# Altium PCB PCB1 - 副本.PcbDoc (part 1 of 2)
Units mil, origin at the board's own origin, x right, y up, seen from the top; angles counter-clockwise.
Board outline 3110.24 x 2637.8 mil, 4 copper layers (Top Layer, GND, PWR, Bottom Layer), stack 30.634 mil thick; 254 components, 131 nets, 691 pads, 4 vias.
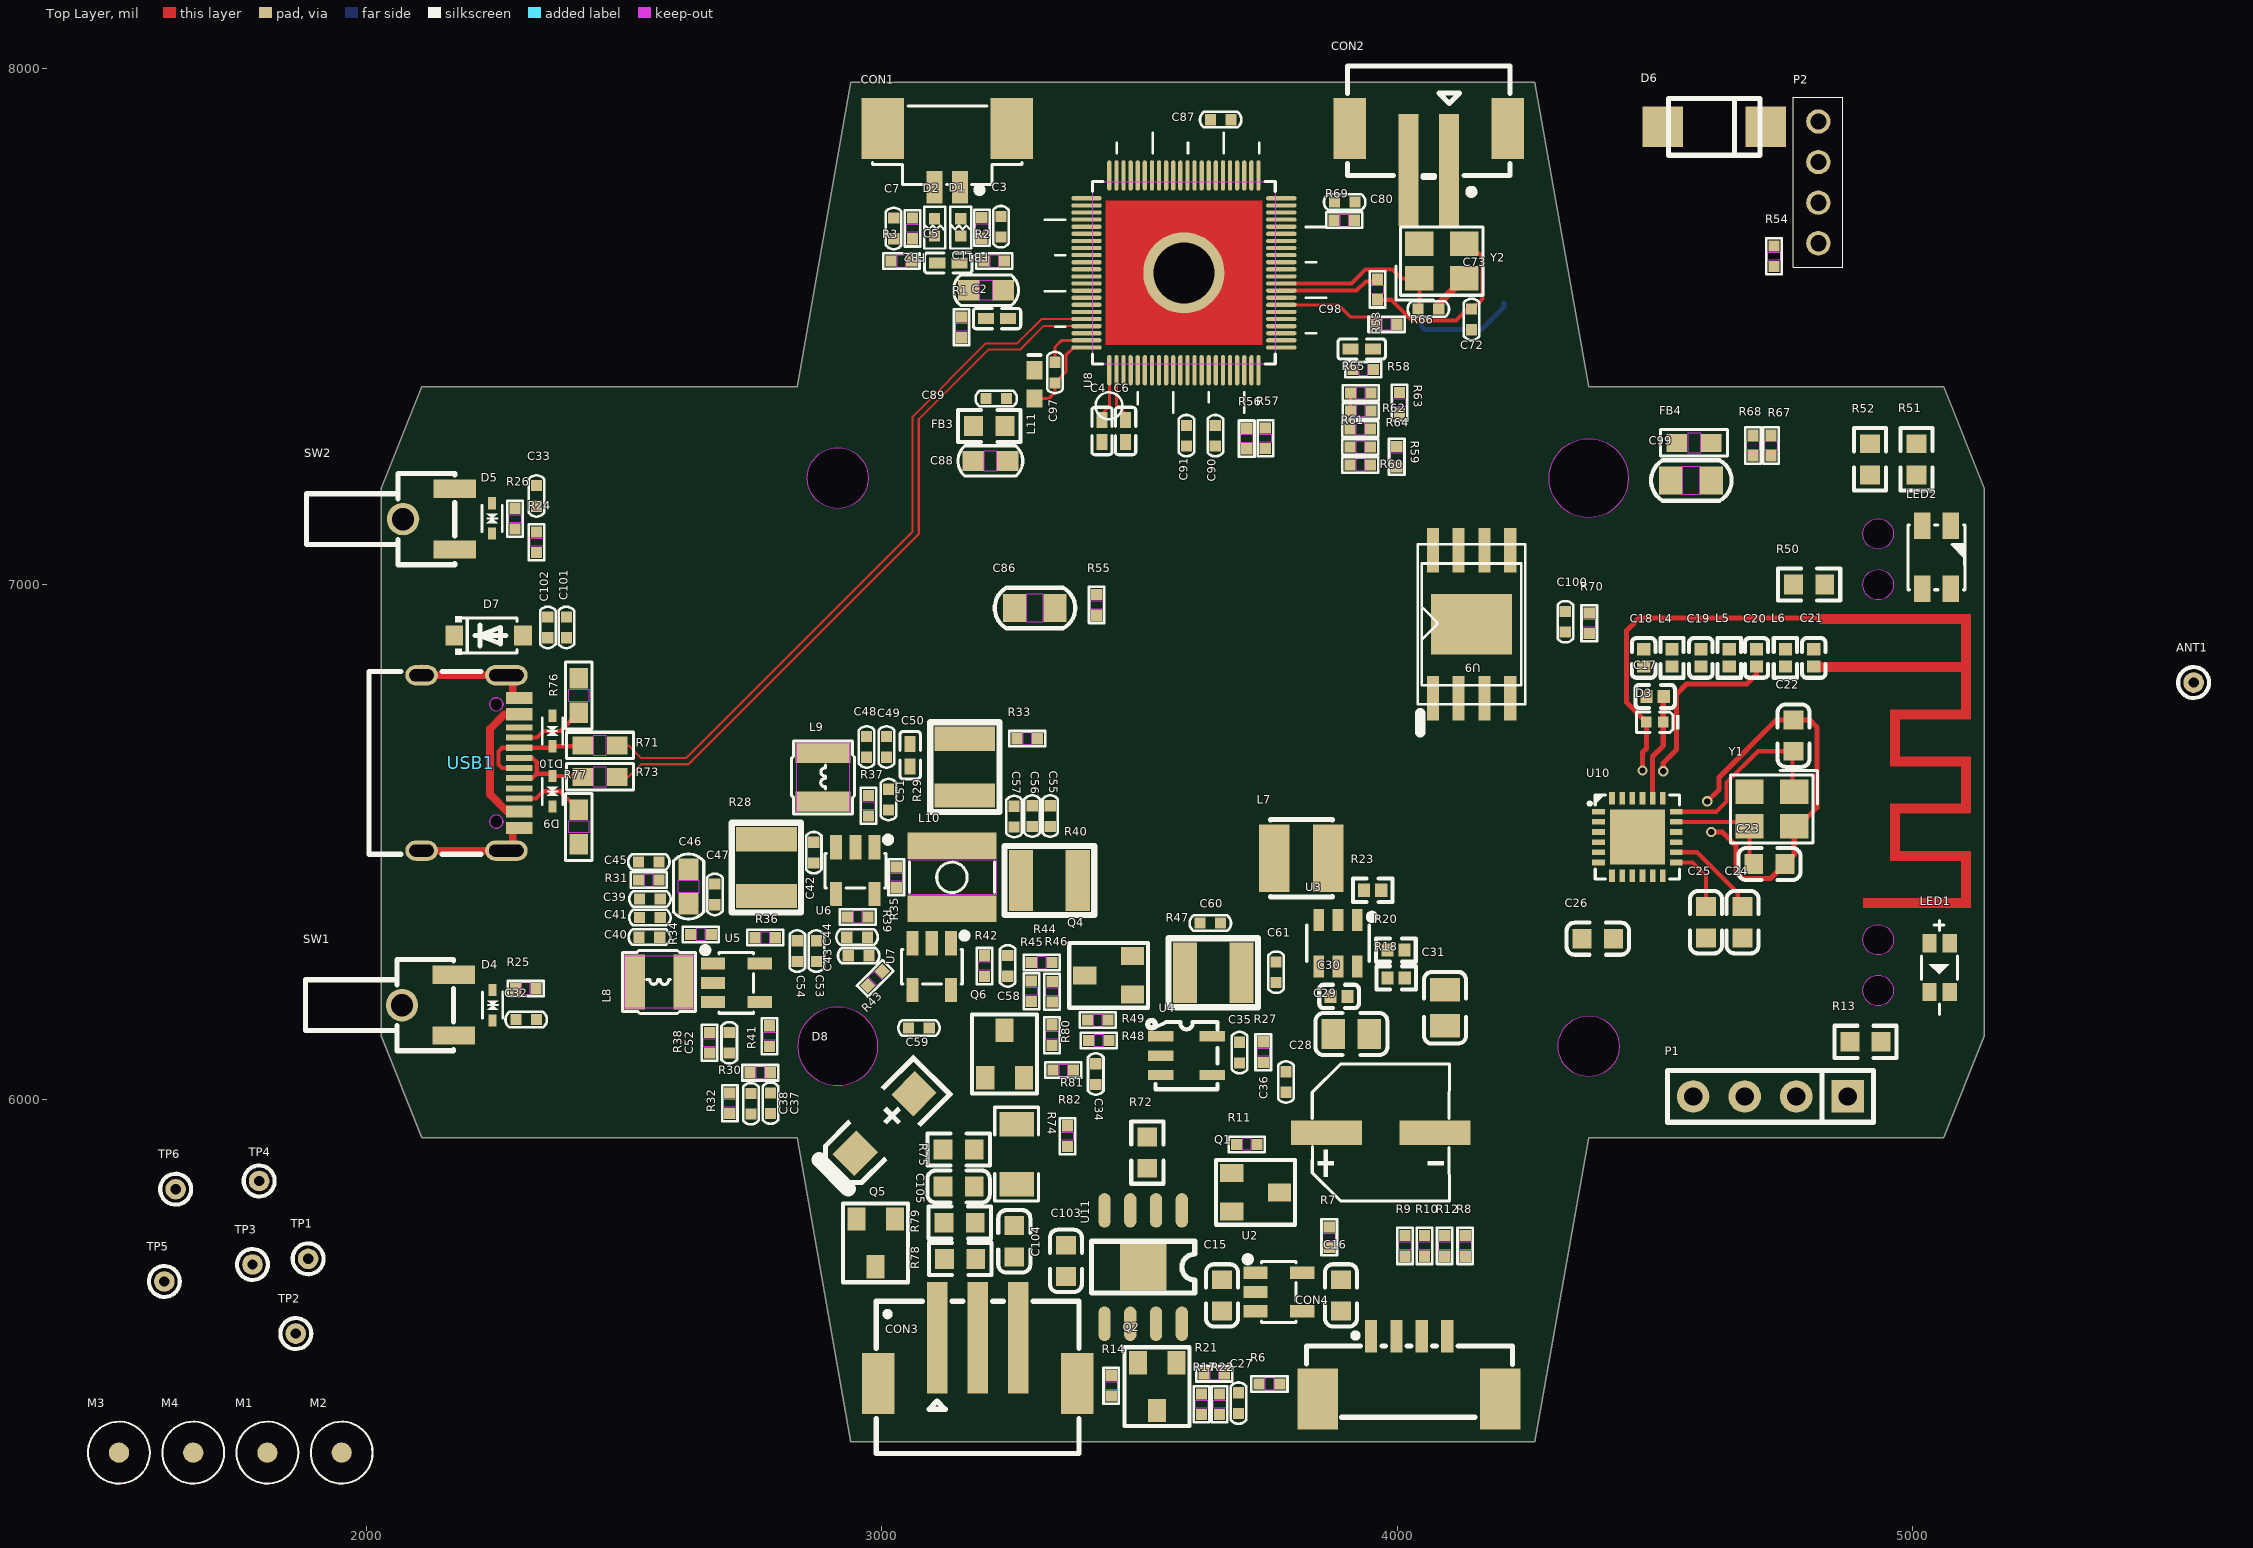
[diagram p0: Top Layer view]
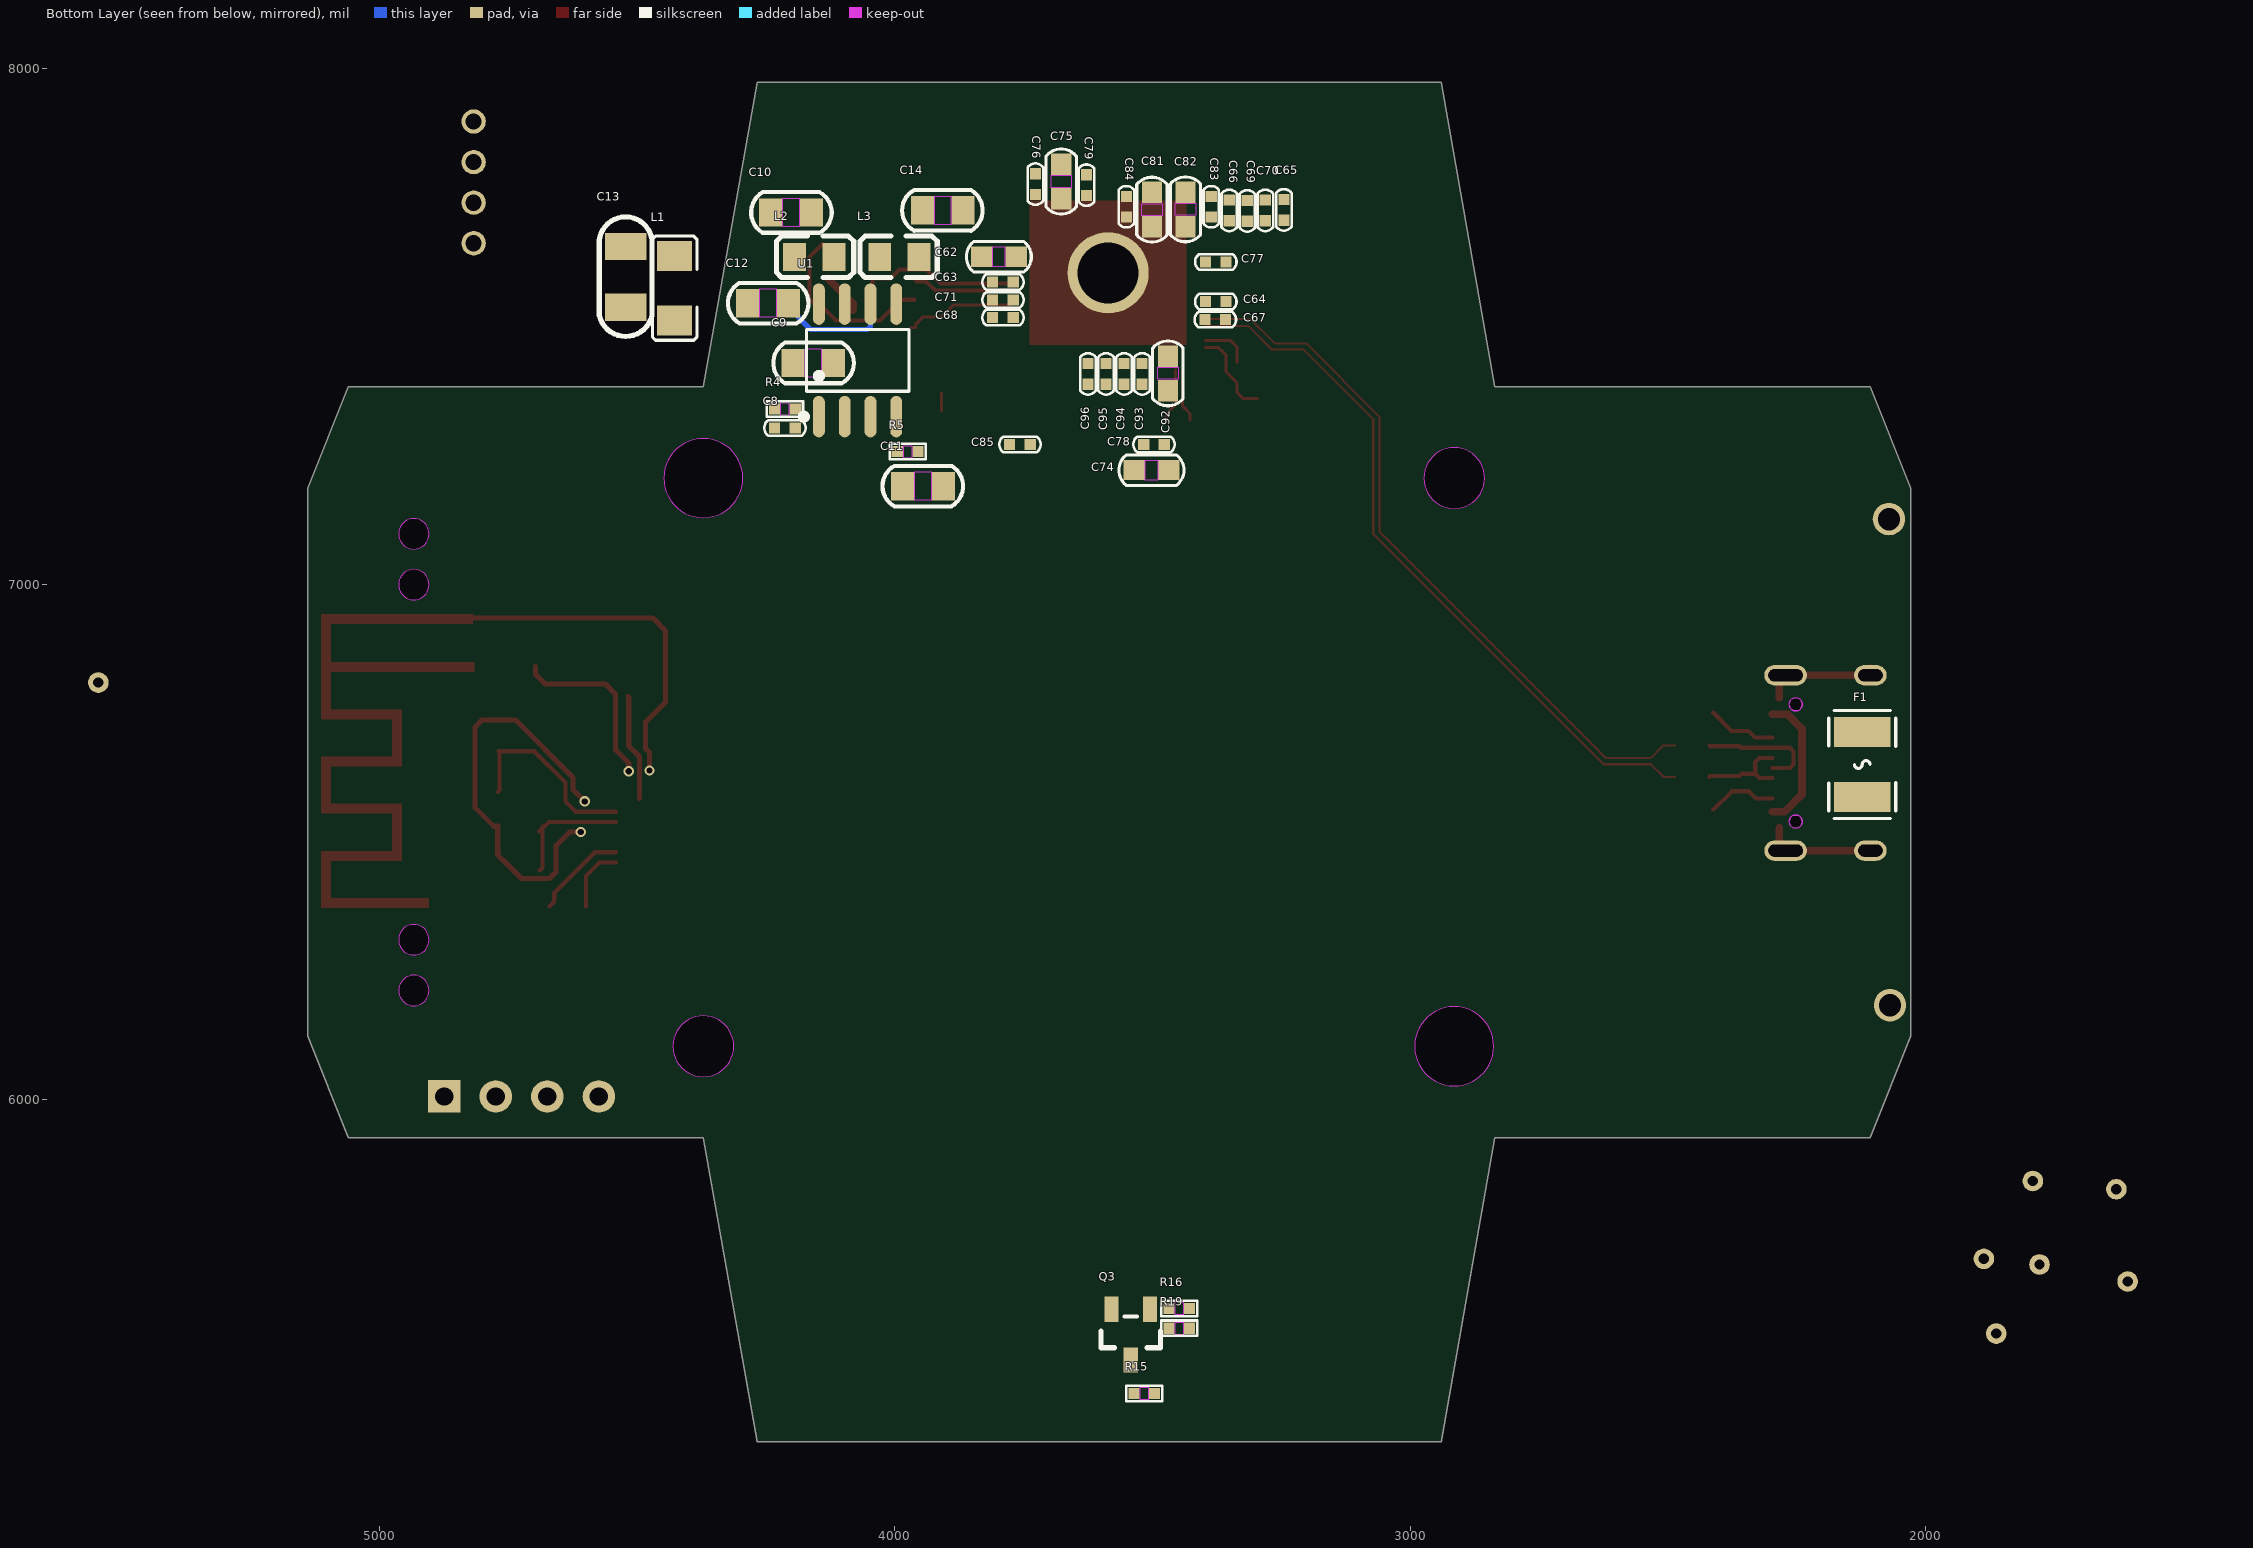
[diagram p1: Bottom Layer view, seen from below]
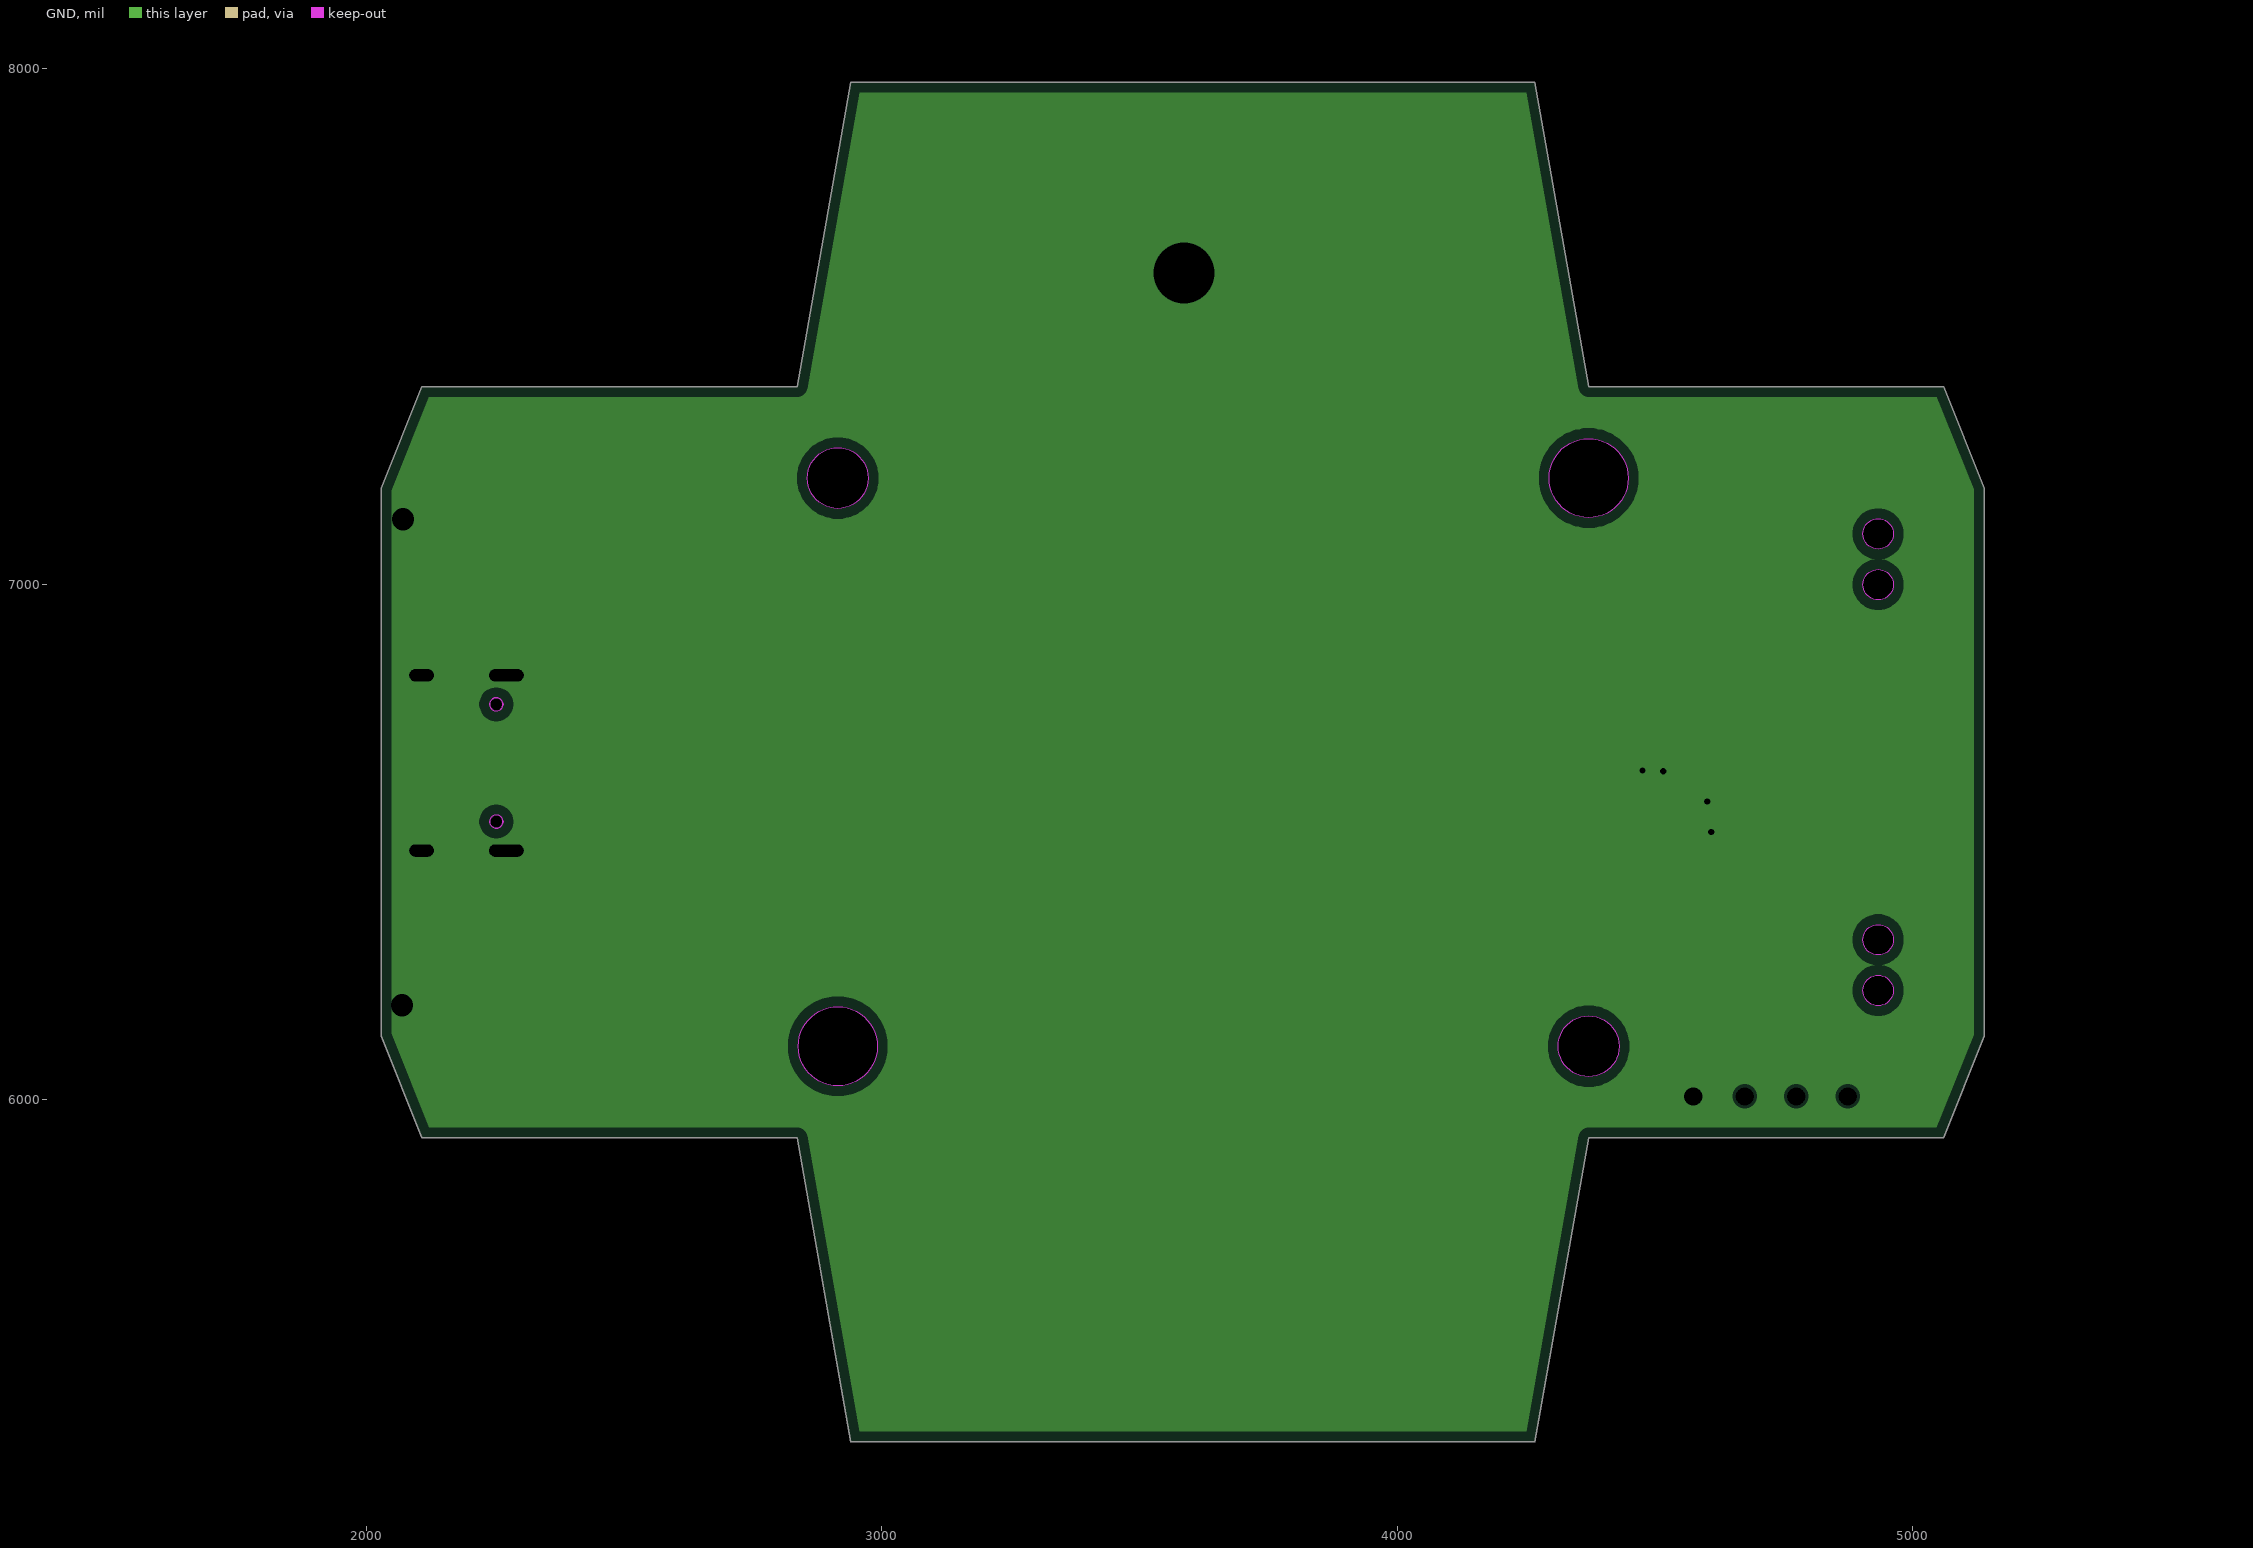
[diagram p2: GND, clearances drawn from the general rule]
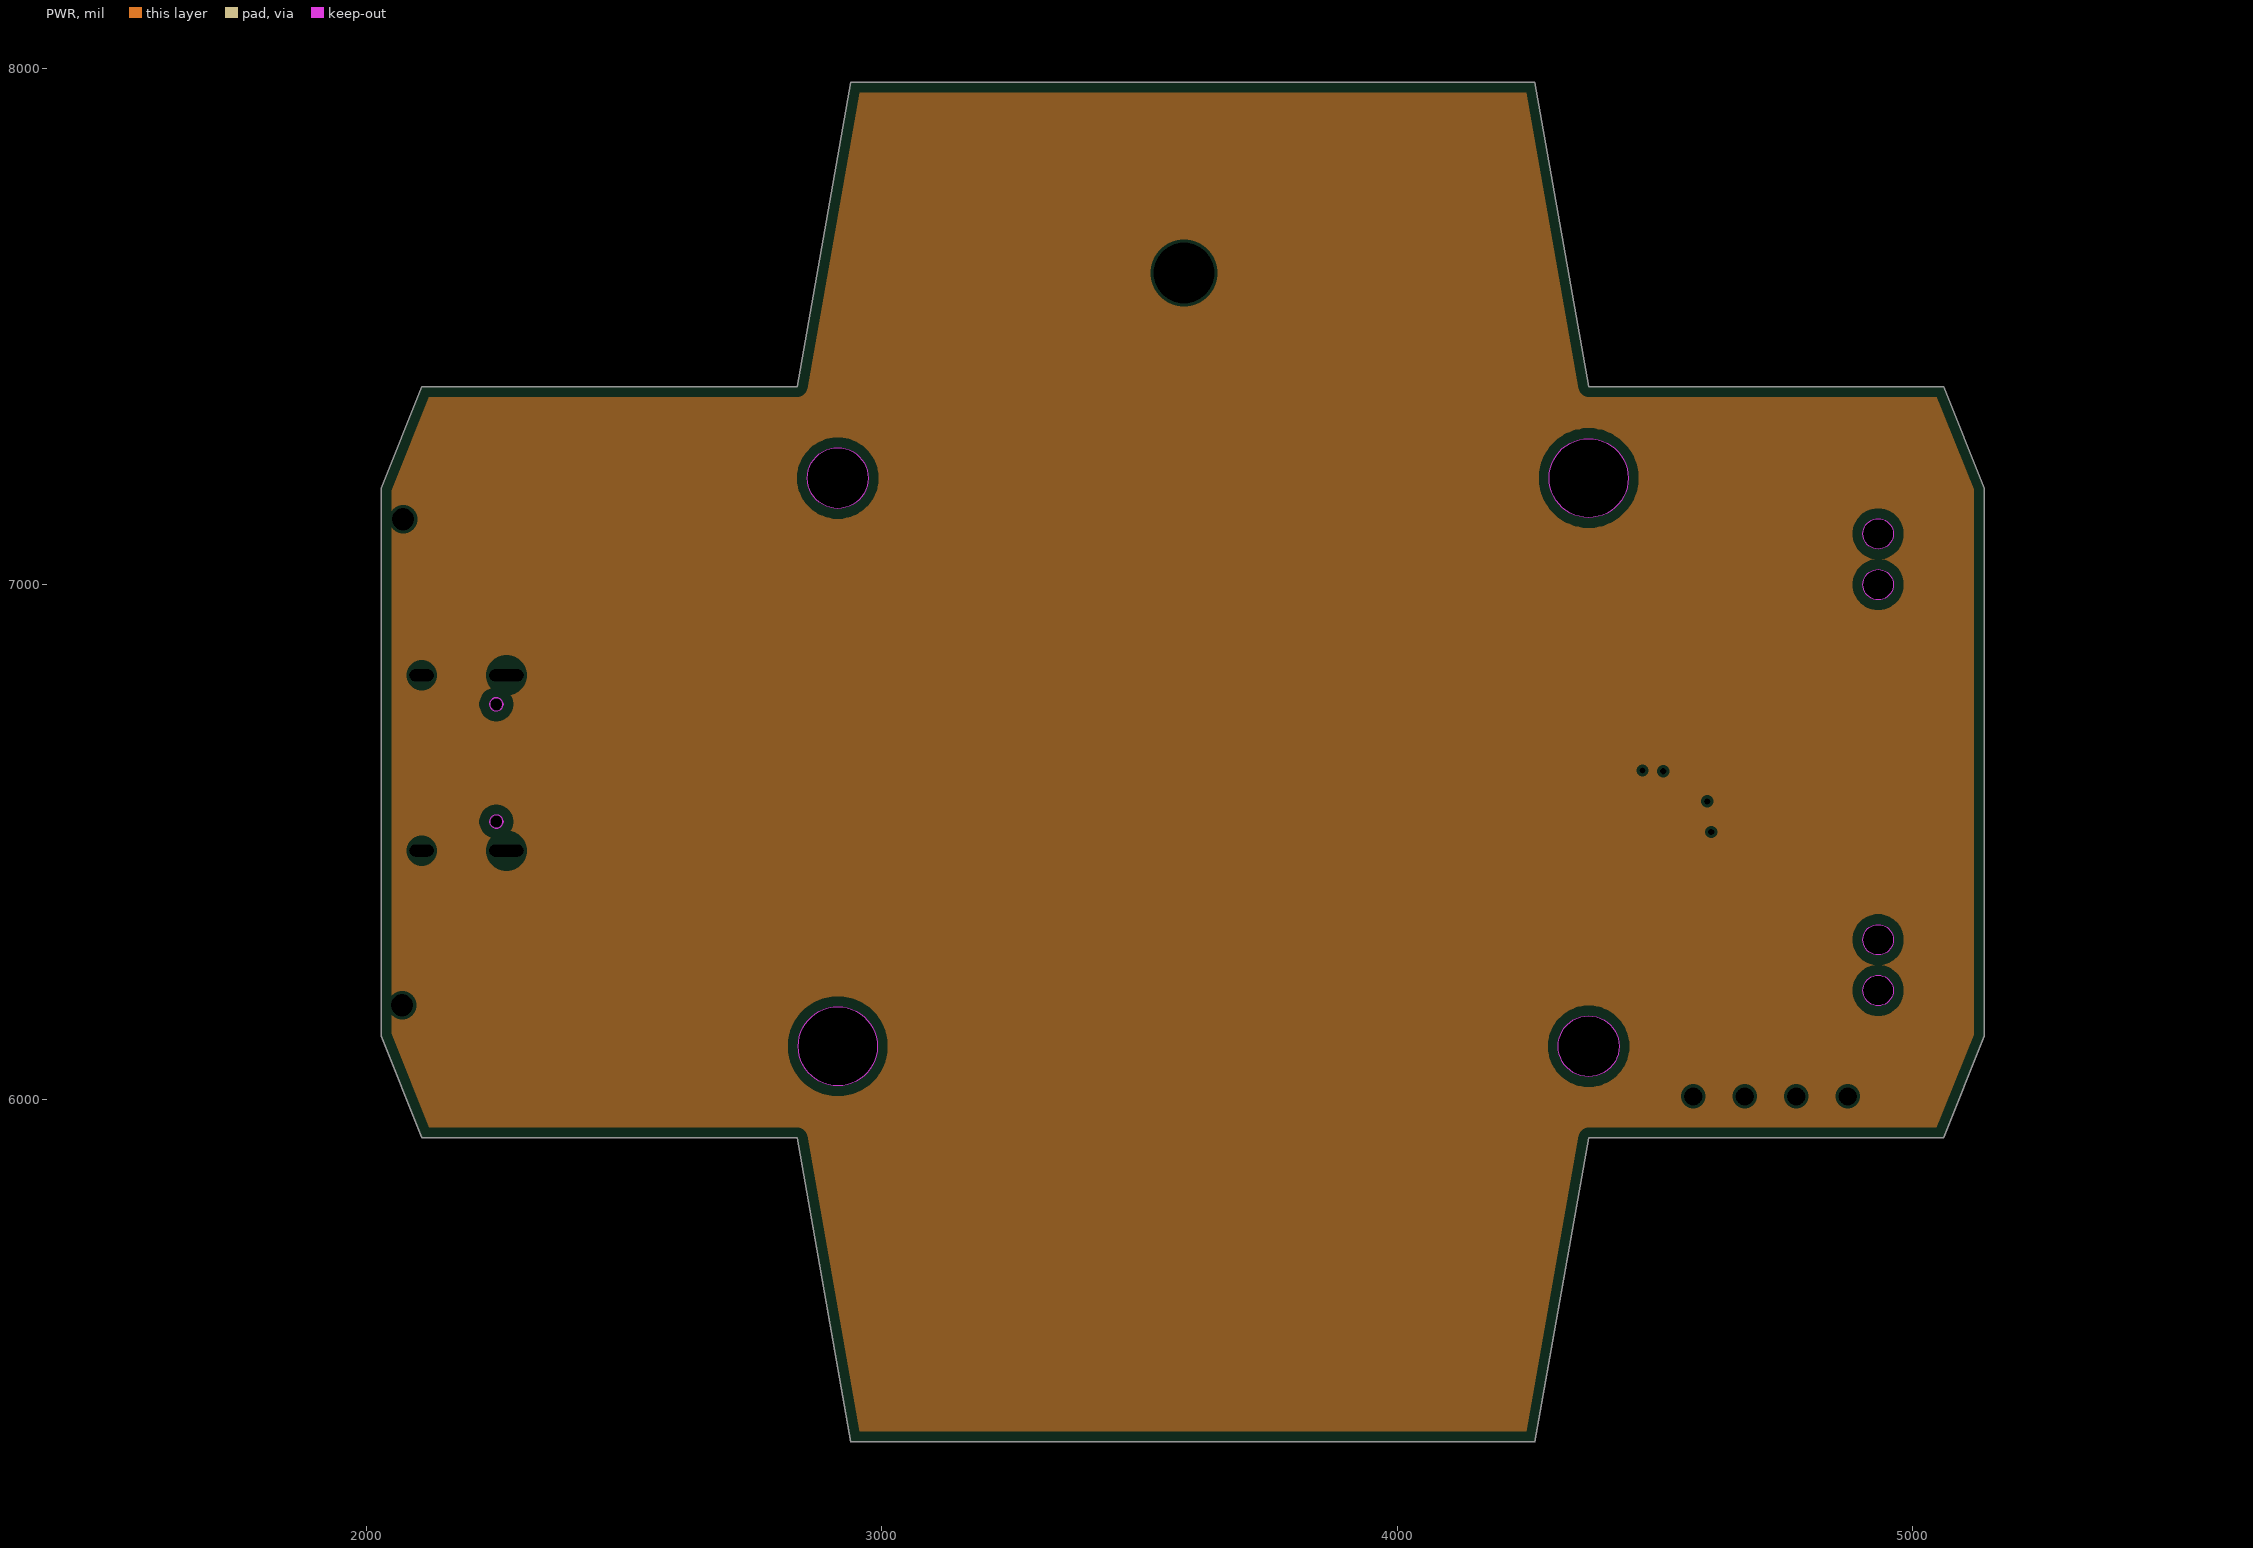
[diagram p3: PWR, clearances drawn from the general rule]

## Layer stack, top to bottom
Top Solder: solder mask 0.4, Solder Resist, Dk 3.5
Top Layer: signal copper 1.4
Dielectric1: core 10, FR-4, Dk 4.2
GND: plane copper 1.417, net DGND
Dielectric 3: prepreg 5, Dk 4.2
PWR: plane copper 1.417
Dielectric 2: core 10, Dk 4.2
Bottom Layer: signal copper 1.4
Bottom Solder: solder mask 0.4, Solder Resist, Dk 3.5

## Board outline
2107.48,5926.15 2835.82,5926.15 2939.95,5335.6 4267.13,5335.6 4371.26,5926.15 5060.23,5926.15 5138.97,6123 5138.97,7185.99 5060.23,7382.84 4371.26,7382.84 4267.13,7973.39 2939.95,7973.39 2835.82,7382.84 2107.48,7382.84 2028.74,7185.99 2028.74,6123
cut-out: 4932.86,6280.48 cw(c4932.86,6310.01) 4903.34,6310.01 cw(c4932.86,6310.01) 4932.86,6339.54 cw(c4932.86,6310.01) 4962.39,6310.01 cw(c4932.86,6310.01)
cut-out: 4932.86,6182.06 cw(c4932.86,6211.58) 4903.34,6211.58 cw(c4932.86,6211.58) 4932.86,6241.11 cw(c4932.86,6211.58) 4962.39,6211.58 cw(c4932.86,6211.58)
cut-out: 4932.86,7067.88 cw(c4932.86,7097.41) 4903.34,7097.41 cw(c4932.86,7097.41) 4932.86,7126.94 cw(c4932.86,7097.41) 4962.39,7097.41 cw(c4932.86,7097.41)
cut-out: 4903.34,6998.99 cw(c4932.86,6998.99) 4932.86,7028.51 cw(c4932.86,6998.99) 4962.39,6998.99 cw(c4932.86,6998.99) 4932.86,6969.46 cw(c4932.86,6998.99)
cut-out: 2914.56,7146.62 cw(c2914.56,7205.68) 2855.51,7205.68 cw(c2914.56,7205.68) 2914.56,7264.73 cw(c2914.56,7205.68) 2973.62,7205.68 cw(c2914.56,7205.68)
cut-out: 2914.56,6026.54 cw(c2914.56,6103.32) 2837.79,6103.32 cw(c2914.56,6103.32) 2914.56,6180.09 cw(c2914.56,6103.32) 2991.34,6103.32 cw(c2914.56,6103.32)
cut-out: 4371.26,6044.26 cw(c4371.26,6103.32) 4312.2,6103.32 cw(c4371.26,6103.32) 4371.26,6162.37 cw(c4371.26,6103.32) 4430.31,6103.32 cw(c4371.26,6103.32)
cut-out: 4371.26,7128.91 cw(c4371.26,7205.68) 4294.48,7205.68 cw(c4371.26,7205.68) 4371.26,7282.45 cw(c4371.26,7205.68) 4448.03,7205.68 cw(c4371.26,7205.68)

## Design rules (kind name [scope] priority, off if disabled: settings)
Clearance [All] p1: gap=4 ignorepadtopadclearanceinfootprint=FALSE
ComponentClearance [All] p1: gap=0 collisioncheckmode=3 verticalgap=0 showdistances=FALSE
DiffPairsRouting [InDifferentialPair('USB')] p1: maxlimit=8 minlimit=8 mostfreqgap=8 toplayer_minwidth=4 toplayer_maxwidth=4 toplayer_prefwidth=4 bottomlayer_minwidth=4 bottomlayer_maxwidth=4 bottomlayer_prefwidth=4 maxuncoupledlength=500
FabricationTestPointUsage TestPointUsage [All] p1: valid=0 allowmultiple=FALSE
FabricationTestpoint Testpoint [All] p1: side=3 testpointundercomponent=TRUE minsize=40 maxsize=100 preferedsize=60 minholesize=0 maxholesize=40 preferedholesize=32 testpointgrid=1 allowsidetop=TRUE allowsidebottom=TRUE usegrid=TRUE gridtolerance=0.01
PlaneClearance [All] p1: clearance=6
PlaneConnect [All] p1: planeconnectstyle=Relief reliefexpansion=20 reliefentries=4 reliefconductorwidth=10 reliefairgap=10
PolygonConnect [All] p1: thpad.connectstyle=Relief thpad.reliefconductorwidth=10 thpad.reliefentries=4 thpad.polygonreliefangle="90 Angle" thpad.airgapwidth=10 smdpad.connectstyle=Relief smdpad.reliefconductorwidth=10 smdpad.reliefentries=4 smdpad.polygonreliefangle="90 Angle" smdpad.airgapwidth=10 via.connectstyle=Direct via.reliefconductorwidth=10 via.reliefentries=4 via.polygonreliefangle="90 Angle" via.airgapwidth=10
RoutingVias [All] p1: holewidth=16 width=28 viastyle="Through Hole" minholewidth=12 minwidth=20 maxholewidth=24 maxwidth=40
SilkToSilkClearance [All] p1: silktosilkclearance=1
SilkToSolderMaskClearance SilkscreenOverComponentPads [IsPad] p1: minsilkscreentomaskgap=0 clearancetoexposedcopper=TRUE
SolderMaskExpansion [All] p1: expansion=4
Width [All] p1: maxlimit=40 minlimit=4 preferedwidth=6
22 further rules are at their usual default settings.

## Classes and differential pairs
component class AUDIO: C1 C2 C3 C4 C5 C6 C7 C8 C9 C10 C11 C12 C13 C14 CON1 CON2 D1 D2 FB1 FB2 L1 L2 L3 R1 R2 R3 R4 R5 U1
component class Bluetooth: *1 ANT1 C15 C16 C17 C18 C19 C20 C21 C22 C23 C24 C25 C26 C27 C28 C29 C30 C31 C32 C33 CON4 D3 D4 D5 L4 L5 L6 L7 LED1 P1 Q1 Q2 Q3 R6 R7 R8 R9 R10 R11 R12 R13 R14 R15 R16 R17 R18 R19 R20 R21 R22 R23 R24 R25 R26 SW1 SW2 TP1 TP2 U2 U3 U10 Y1
component class POWER: C34 C35 C36 C37 C38 C39 C40 C41 C42 C43 C44 C45 C46 C47 C48 C49 C50 C51 C52 C53 C54 C55 C56 C57 C58 C59 C60 C61 L8 L9 L10 M1 M2 M3 M4 Q4 R27 R28 R29 R30 R31 R32 R33 R34 R35 R36 R37 R38 R39 R40 R41 R42 R43 R44 R45 R46 R47 R48 R49 TP3 TP4 TP5 TP6 U4 U5 U6 U7
component class QFN88_FLASH_UART: C62 C63 C64 C65 C66 C67 C68 C69 C70 C71 C72 C73 C74 C75 C76 C77 C78 C79 C80 C81 C82 C83 C84 C85 C86 C87 C88 C89 C90 C91 C92 C93 C94 C95 C96 C97 C98 C99 C100 D6 FB3 FB4 L11 LED2 P2 R50 R51 R52 R53 R54 R55 R56 R57 R58 R59 R60 R61 R62 R63 R64 R65 R66 R67 R68 R69 R70 U8 U9 Y2
component class USB_CHARGE: C101 C102 C103 C104 C105 CON3 D7 D8 D9 D10 F1 J2 Q5 Q6 R71 R72 R73 R74 R75 R76 R77 R78 R79 R80 R81 R82 U11 USB1
differential pair USB_1: +USB_DM -USB_DP
differential pair USB: +USB_DM -USB_DP

## Components (designator, comment, footprint, x,y, rotation, side; value= is the part's Value field where it differs from the comment)
ANT1 "" TP 5545,6809 r90 top
C1 "10uF" C0603 3202,7570 r180 top
C2 "100nF" C0402#1 3223.46,7515 r0 top
C3 "33pF" C0402#2 3231,7693.35 r270 top
C4 "100nF" C0402#1 3427,7297 r90 top
C5 "1.5nF" C0402#1 3129,7623 r180 top
C6 "100nF" C0402#1 3473,7297 r90 top
C7 "33pF" C0402#2 3023,7690 r90 top
C8 "100nF" C0402#2 4213,7303 r0 bottom
C9 "1uF" C0805 4158,7429 r180 bottom
C10 "1nF" C0805 4201,7721 r180 bottom
C11 "47nF" C0805 3945,7190 r0 bottom
C12 "100nF" C0805 4246,7545 r180 bottom
C13 "47uF" C1206 4522,7596 r90 bottom
C14 "1nF" C0805 3907,7725 r0 bottom
C15 "1uf" 0603_C 3660,5620 r90 top
C16 "10uF" 0603_C 3891,5620 r90 top value=10nF
C17 "220pF" 0402_C 4500.27,6782 r180 top
C18 "NC" 0402_C 4478,6856.73 r90 top
C19 "NC" 0402_C 4589,6856.73 r270 top
C20 "NC" 0402_C 4697,6856.73 r90 top
C21 "NC" 0402_C 4808,6856.73 r270 top
C22 "12PF" 0603_C 4769,6706 r270 top
C23 "12PF" 0603_C 4722,6457 r180 top
C24 "1UF" 0603_C 4670,6344 r270 top
C25 "1UF" 0603_C 4599,6344 r270 top
C26 "1UF" 0603_C 4389,6312 r0 top
C27 "100nF" C0402#2 3692,5411 r90 top
C28 "100uF/25V" "SMD 6.3*5.4 电解" 3974,5935 r0 top value=220uF
C29 "22UF" 0805_C 3911,6127 r180 top
C30 "1UF" 0402_C 3887,6200 r180 top
C31 "22UF" 0805_C 4092.49,6178.04 r90 top
C32 "100nF" C0402#2 2310,6155 r0 top
C33 "100nF" C0402#2 2330,7171 r270 top
C34 "10uF" C0402#2 3415,6049.49 r90 top
C35 "10uF" C0402#2 3694,6091 r90 top
C36 "100nF" C0402#2 3784,6034 r90 top
C37 "10uF" C0402#2 2784,5993 r90 top
C38 "100nF" C0402#2 2746,5992 r90 top
C39 "22uF" C0402#2 2550,6389 r0 top
C40 "10uF" C0402#2 2549,6315 r0 top
C41 "100nF" C0402#2 2550,6353 r0 top
C42 "100nF" C0402#2 2868,6479 r270 top
C43 "10uF" C0402#2 2955,6279 r180 top
C44 "100nF" C0402#2 2952,6315 r180 top
C45 "22uF" C0402#2 2548,6461 r0 top
C46 "10uF_10V" C0603 2625,6413.2 r90 top
C47 "100nF" C0402#2 2676,6398 r90 top
C48 "22uF" C0402#2 2970.54,6684 r90 top
C49 "10uF" C0402#2 3009,6684 r90 top
C50 "100nF" C0402#1 3055,6668 r270 top
C51 "100nF" C0402#2 3013,6582 r270 top
C52 "100nF" C0402#2 2704,6110 r270 top
C53 "10uF" C0402#2 2873,6288 r270 top
C54 "100nF" C0402#2 2836,6288 r270 top
C55 "22uF" C0402#2 3326.68,6550 r270 top
C56 "22uF" C0402#2 3291.68,6550 r270 top
C57 "100nF" C0402#2 3256.68,6549 r270 top
C58 "47pF" C0402#2 3244.21,6259.3 r270 top
C59 "220nF" C0402#2 3072,6139 r180 top
C60 "100nF" C0402#2 3637.32,6342.19 r0 top
C61 "100nF" C0402#2 3765,6247 r90 top
C62 "10uF" C0603 3798,7635 r0 bottom locked
C63 "100nF" C0402#2 3790,7586 r180 bottom locked
C64 "100nF" C0402#2 3377,7548 r0 bottom locked
C65 "100nF" C0402#2 3245,7726 r270 bottom
C66 "100nF" C0402#2 3351,7725 r270 bottom locked
C67 "100nF" C0402#2 3378,7513 r0 bottom locked
C68 "100nF" C0402#2 3790,7517 r180 bottom locked
C69 "100nF" C0402#2 3316,7724 r270 bottom locked
C70 "100nF" C0402#2 3281,7725 r270 bottom
C71 "100nF" C0402#2 3790,7551.31 r180 bottom locked
C72 "18pF" C0402#2 4060.31,7533.53 r180 top
C73 "18pF" C0402#2 4144.31,7513.53 r90 top
C74 "10uF" C0603 3502,7221 r0 bottom locked
C75 "10uF" C0603 3677,7781 r90 bottom locked
C76 "100nF" C0402#2 3727,7776 r270 bottom locked
C77 "100nF" C0402#2 3377,7625 r0 bottom locked
C78 "100nF" C0402#2 3497,7271 r180 bottom locked
C79 "100nF" C0402#2 3628,7774 r270 bottom locked
C80 "100nF" C0402#2 3898,7741 r180 top
C81 "10uF" C0603 3501,7726.46 r90 bottom locked
C82 "10uF" C0603 3436,7727 r90 bottom locked
C83 "100nF" C0402#2 3386,7732 r270 bottom locked
C84 "100nF" C0402#2 3550.54,7732 r270 bottom locked
C85 "100nF" C0402#2 3757,7271 r0 bottom locked
C86 "2.2uF" C0805 3296.6,6953.6 r0 top
C87 "100nF" C0402#2 3657.32,7901 r0 top
C88 "10uF" C0603 3210.54,7238.87 r0 top
C89 "100nF" C0402#2 3222,7359.87 r180 top
C90 "100nF" C0402#2 3647,7288 r90 top
C91 "1uF" C0402#2 3591,7288 r90 top
C92 "10uF" C0603 3470,7408.81 r270 bottom locked
C93 "100nF" C0402#2 3520,7407.81 r90 bottom locked
C94 "100nF" C0402#2 3555,7407.81 r90 bottom locked
C95 "100nF" C0402#2 3590,7407.81 r90 bottom locked
C96 "100nF" C0402#2 3625,7407.81 r90 bottom locked
C97 "10uF" C0402#2 3336,7410.44 r270 top
C98 "NC/100nF" C0402#1 3931,7456 r180 top
C99 "100nF" C0805 4570,7201 r0 top
C100 "100nF" C0402#2 4326,6927 r90 top
C101 "100nF" C0402#2 2388,6916 r90 top
C102 "10uF" C0402#2 2352,6916 r90 top
C103 "10uf" 0603_C 3357,5687 r90 top value=10nF
C104 "10UF" 0603_C 3257,5725 r90 top
C105 "100nF" 0603_C 3149,5831 r0 top
CON1 "MK" CONN-SMD_2P-P1.25-LT 3127,7827 r180 top
CON2 "SPK" CONN-SMD_2.0-2PLT 4069,7868 r0 top
CON3 "BX-PH2.0-3PZZ" CONN-SMD_2.0-3PLT 3223.41,5488.27 r180 top
CON4 "Ultra" CONN-SMD_4P-P1.25_LT 4023,5480 r0 top
D1 "DCE0510D2" D0402_0.55X0.6 3153,7692 r90 top
D2 "DCE0510D2" D0402_0.55X0.6 3102.39,7692 r90 top
D3 "SE6V3LHN102T 6.3v单向" 0402-D 4497,6727 r180 top
D4 "LESD5Z5.0CT1G" SOD-523_L1.2-W0.8-LS1.6-BI 2245,6183.1 r90 top
D5 "LESD5Z5.0CT1G" SOD-523_L1.2-W0.8-LS1.6-BI 2244,7127.48 r90 top
D6 "SS24" DO-214AC 4615,7887 r180 top
D7 "SMF6.0A" SOD-123 2256,6906 r0 top
D8 "SS34" SMA 3020,5973 r45 top
D9 "LESD5Z5.0CT1G" SOD-523_L1.2-W0.8-LS1.6-BI 2361,6598 r90 top
D10 "LESD5Z5.0CT1G" SOD-523_L1.2-W0.8-LS1.6-BI 2361,6715 r270 top
F1 "6V 4A" F1210 2123,6650 r90 bottom
FB1 "0R" R0402 3194,7691 r270 top
FB2 "0R" R0402 3059.6,7690 r270 top
FB3 "FB120R" 0603_R 3208.31,7306.87 r0 top
FB4 "FB120R" R0603 4576,7274 r0 top
L1 "600R" L1206 4427,7574 r90 bottom
L2 "1K 0.5A" L0805 4156,7635 r0 bottom
L3 "1K 0.5A" L0805 3991,7635 r180 bottom
L4 "0R" 0402_R 4533,6856.73 r270 top
L5 "0R" 0402_R 4644,6856.73 r90 top
L6 "0R" 0402_R 4753,6856.73 r270 top
L7 "SLW3012P1R5MST SMD3.0*3.0" IND-SMD_L3.0-W3.0 3856.28,6453 r0 top
L8 "2.2uH/1A" SWPA3015S 2568,6228 r180 top
L9 "2.2uH/1A" SWPA3015S 2886,6625 r90 top
L10 "2.2uH/2.7A" L-MLPS-4018 3136,6431 r0 top
L11 "FB60R/300mA" L0603 3296,7387.44 r270 top
LED1 "*" LED-SMD_4P-L3.2-W1.6-TL_XL-3216SURUGC 5052,6256 r270 top
LED2 "XL-A3528RGBC-BM" LED-ARRAY-SMD_4P-L3.2-W2.8-LS3.5-BL_XL-A3528RGBC-BM 5046,7052 r90 top
M1 "T_POINT" MAK 1808,5315 r0 top
M2 "T_POINT" MAK 1952,5315 r0 top
M3 "T_POINT" MAK 1520,5315 r0 top
M4 "T_POINT" MAK 1664,5315 r0 top
P1 "DEBUG" SIP4-2.54 4874,6006 r180 top
P2 "CON4-DIP-2.0mm" "SIP4 2.0" 4838,7944.48 r270 top
Q1 "2N7002" SOT-23 3725,5820 r270 top
Q2 "SI2301 P" SOT-23 3534,5443 r180 top
Q3 "S8050" SOT-23(SOT-23-3) 3542,5544 r90 bottom
Q4 "2N7002" SOT-23 3440,6241 r90 top
Q5 "CJ3401" SOT-23 2988,5722 r180 top
Q6 "2N7002" SOT-23 3238,6088.34 r0 top
R1 "4K7" R0402 3155,7498 r90 top
R2 "2K" R0402 3218,7627 r180 top
R3 "2K" R0402 3038,7627 r180 top
R4 "10K" R0402 4213,7340 r0 bottom
R5 "12K" R0402 3975,7257 r0 bottom value=30K
R6 "10k" R0402 3752,5448 r0 top value=120R
R7 "10K" R0402 3868,5733 r90 top
R8 "10K" R0402 4131.81,5716 r270 top value=100R
R9 "10K" R0402 4015,5716 r270 top value=100R
R10 "100R" R0402 4052.81,5716 r270 top
R11 "47K" R0402 3708,5913 r0 top
R12 "100R" R0402 4092,5716 r270 top
R13 "1K" 0603_R 4908.31,6112 r0 top
R14 "560K" R0402 3445,5445 r270 top
R15 "1K" R0402 3516,5430 r0 bottom
R16 "1K" R0402 3448.13,5594.51 r180 bottom value=120R
R17 "560K" R0402 3620.47,5409 r90 top
R18 "470k" 0402_R 3997.73,6236 r0 top value=120R
R19 "10K" R0402 3448.13,5556.35 r0 bottom value=120R
R20 "150k" 0402_R 3997.49,6289.97 r0 top value=120R
R21 "1K" R0402 3645,5468 r180 top
R22 "100K" R0402 3655,5409 r270 top
R23 "1M" 0402_R 3952.27,6406 r180 top value=120R
R24 "10K" R0402 2330,7081 r270 top
R25 "100R" R0402 2309,6215 r0 top
R26 "100R" R0402 2288,7127 r270 top
R27 "0R" R0402 3740,6092 r270 top
R28 "0R" R1210 2776,6450 r90 top
R29 "0R" R1210 3161,6645 r90 top
R30 "NC/100K" R0402 2764,6052 r0 top
R31 "NC/10K" R0402 2548,6426 r180 top
R32 "NC/100K" R0402 2705,5993 r90 top
R33 "1K/NC" R0402 3282,6700 r0 top
R34 "150K/1%" R0402 2649,6320 r0 top
R35 "15K/1%" R0402 3028,6431 r270 top
R36 "33K/1%" R0402 2774,6314 r180 top
R37 "100K" R0402 2974,6570 r90 top
R38 "100K" R0402 2666,6110 r90 top
R39 "10K/1%" R0402 2953,6354 r0 top
R40 "0R" R1210 3325,6425 r0 top
R41 "NC/100K" R0402 2782,6123 r270 top
R42 "10K/1%" R0402 3199,6259 r270 top
R43 "100K" R0402 2987,6235 r225 top
R44 "60.4K/1%" R0402 3310,6266 r180 top
R45 "20K/1%" R0402 3290,6210 r90 top
R46 "NC/0R" R0402 3330.49,6209 r90 top
R47 "0R" R1210 3643,6246 r0 top
R48 "4K7" R0402 3421,6114.84 r180 top
R49 "NC" R0402 3419,6154 r180 top
R50 "1k" 0603_R 4799,6999 r180 top
R51 "1k" 0603_R 5007,7242.04 r90 top
R52 "1k" 0603_R 4917,7242 r90 top
R53 "22R" R0402 3961.31,7571.53 r90 top
R54 "4K7" R0402 4731,7636 r90 top
R55 "20K" R0402 3416.84,6959.5 r90 top
R56 "100R" R0402 3708,7282.45 r90 top
R57 "100R" R0402 3744,7283 r90 top
R58 "0R" R0402 3934,7416 r0 top
R59 "3K3" R0402 3999,7247 r270 top
R60 "0R" R0402 3928,7231 r0 top
R61 "0R" R0402 3928,7266 r180 top
R62 "0R" R0402 3929,7336 r0 top
R63 "3K3" R0402 4004,7352 r270 top
R64 "0R" R0402 3928,7301 r0 top
R65 "0R" R0402 3929,7371 r180 top
R66 "0R" R0402 3979.13,7504 r0 top
R67 "NC/10K" R0402 4725.19,7268.87 r90 top
R68 "NC/10K" R0402 4690.19,7268.87 r90 top
R69 "1M" R0402 3897,7706 r180 top
R70 "10K" R0402 4372.42,6924 r90 top
R71 "2.2R" R0603 2453,6687 r0 top
R72 "1.3k" 0603_R 3515,5897 r270 top
R73 "2.2R" R0603 2453,6626 r0 top
R74 "R250" 1206_R 3260,5900 r90 top
R75 "10K" 0603_R 3149,5903 r0 top value=120R
R76 "5.1K" R0603 2412,6784 r90 top
R77 "5.1K" R0603 2412,6529 r270 top
R78 "10K" 0603_R 3152,5691 r0 top
R79 "1K" 0603_R 3151,5761 r180 top
R80 "4.7K" R0402 3330,6125 r270 top
R81 "0R" R0402 3352,6057 r180 top
R82 "47K" R0402 3360,5929 r90 top
SW1 "Reset" SMD-KEY-3 2114,6198 r270 top
SW2 "OnOff" SMD-KEY-3 2116,7141 r270 top
TP1 "3v3_ble" TP 1887,5691 r0 top
TP2 "5V" TP 1863,5546 r90 top
TP3 "1V8" TP 1779,5680 r90 top
TP4 "3V3" TP 1792,5842 r90 top
TP5 "1V5" TP 1608,5647 r90 top
TP6 "1V0" TP 1630,5826 r90 top
U1 "NS4158" SOIC-8_L4.9-W3.9-P1.27-LS6.0-BL 4072,7434 r180 bottom
U2 "SSP7615" SOT-23-5 3777,5644 r0 top
U3 "SY7069ADC" SOT-23-6 3897.59,6338.32 r180 top
U4 "FP6185-18S5" SOT23-5P 3591,6085 r90 top
U5 "TMI3408/FP6396A" SOT-23-5 2724.62,6243.73 r0 top
U6 "TMI3408/FP6396A" SOT-23-5 2966,6437 r270 top
U7 "TMI3411/FP6378A" SOT-23-5 3114.33,6250.83 r270 top
U8 "SSC37X" IC-88P-QFN9X9-P035 3586.02,7603.79 r90 top locked
U9 "W25NO1GVZE1G" SOP8-150+208 4144,6922 r90 top
U10 "TLSR8208B" QFN-24-EP(4*4) 4466.4,6510.5 r0 top
U11 "TP4056X" SOP8-9 3507,5675 r180 top
USB1 "HC-TYPE-C-16P-01A" USB-C-SMD_HC-TYPE-C-16P-01A 2202,6653 r270 top
Y1 "24MHz +-20PPM" CRYSTAL-SMD_4P-L3.2-W2.5 4715.56,6565.62 r180 top value=13.56MHz
Y2 "24MHz" CRYSTAL-SMD_4P-L3.2-W2.5-BL 4086.31,7626.53 r0 top

## Footprints (in the part's own frame and the unit in brackets; to place one, negate y for a bottom-side part, rotate by r counter-clockwise, add the part's x,y. Pads: shape width x height; smd on the part's side, far side on the other; paste and mask are expansions set on the pad)
0402-D [mil]
  rect 19.89x21.68 smd paste-3937.01 mask+2: 1(-19.05,-5.15) 2(13.75,-5.15)
  silkscreen extent -50,-25 33,15
0402_C [mm]
  rect 0.6x0.65 smd: 1(-0.425,0) 2(0.425,0)
  silkscreen extent -0.98,-0.58 0.98,0.58, body extent -0.48,-0.3 0.52,0.3, height 0.2
0402_R [mm]
  rect 0.6x0.65 smd: 1(-0.425,0) 2(0.425,0)
  silkscreen extent -0.97,-0.58 0.98,0.58, body extent -0.57,-0.27 0.58,0.28, height 0.41
0603_C [mm]
  rect 0.93x0.98 smd: 1(-0.77,0) 2(0.77,0)
  silkscreen extent -1.54,-0.79 1.54,0.79, body extent -0.8,-0.4 0.8,0.4, height 0.3
0603_R [mm]
  rect 0.93x0.98 smd: 1(-0.77,0) 2(0.77,0)
  silkscreen extent -1.53,-0.79 1.54,0.79, body extent -0.85,-0.4 0.85,0.4, height 0.56
0805_C [mm]
  rect 1.16x1.47 smd: 1(-0.89,0) 2(0.89,0)
  silkscreen extent -1.77,-1.04 1.77,1.04, body extent -1,-0.62 1,0.63, height 0.77
1206_R [mil]
  rect 47.54x66.97 smd: 1(-64.23,-1.52) 2(52.21,-1.52)
  silkscreen extent -97,-44 85,41
C0402#1 [mm]
  rect 0.79x0.54 smd: 1(-0.545,0) 2(0.545,0)
  silkscreen extent -1.17,-0.5 1.17,0.5
C0402#2 [mm]
  rect 0.55x0.55 smd mask+0.025: 1(-0.508,0) 2(0.508,0)
  silkscreen extent -1.02,-0.38 1.02,0.38
C0603 [mil]
  rect 42x39 smd: 1(-33.46,0) 2(33.46,0)
  Top Layer keep-out region: -11.81,19.69 11.81,19.69 11.81,-19.69 -11.81,-19.69 -11.81,19.69
  silkscreen extent -63,-30 63,30
C0805 [mil]
  rect 45x55 smd: 1(-39.37,0) 2(39.37,0)
  Top Layer keep-out region: -15.75,27.56 15.75,27.56 15.75,-27.56 -15.75,-27.56 -15.75,27.56
  silkscreen extent -77,-39 79,39
C1206 [mil]
  rect 53x80 smd: 1(-59.06,0) 2(59.06,0)
  silkscreen extent -116,-51 116,51
CONN-SMD_2.0-2PLT [mm]
  rect 1x5.5 smd: 1(0.798,-1.644) 2(-1.202,-1.644)
  rect 1.6x3 smd: 3(3.698,0.406) 4(-4.102,0.406)
  silkscreen extent -4.2,-2.87 3.8,3.48
CONN-SMD_2.0-3PLT [mm]
  rect 1x5.5 smd: 1(2.95,-1.263) 2(0.95,-1.263) 3(-1.05,-1.263)
  rect 1.6x3 smd: 4(-3.95,0.987) 5(5.85,0.987)
  silkscreen extent -4.05,-3.06 5.95,4.44
CONN-SMD_2P-P1.25-LT [mm]
  rect 0.8x1.6 smd paste+0 mask+0.05: 1(-0.625,1.45) 2(0.625,1.45)
  rect 2.1x3 smd paste+0 mask+0.05: 3(-3.175,-1.45) 4(3.175,-1.45)
  silkscreen extent -3.68,-2.55 3.68,1.73
CONN-SMD_4P-P1.25_LT [mm]
  rect 0.6x1.6 smd paste+0.051: 1(-1.875,1.55) 2(-0.625,1.55) 3(0.625,1.55) 4(1.875,1.55)
  rect 2x3 smd paste+0.051: 5(-4.5,-1.55) 6(4.5,-1.55)
  silkscreen extent -5.06,-2.45 5.09,1.7
CRYSTAL-SMD_4P-L3.2-W2.5 [mm]
  rect 1.4x1.2 smd: 1(-1.383,-0.797) 2(0.817,-0.797) 3(0.817,0.903) 4(-1.383,0.903)
  silkscreen extent -2.54,-1.85 1.75,1.73
CRYSTAL-SMD_4P-L3.2-W2.5-BL [mm]
  rect 1.4x1.2 smd: 1(-1.1,-0.85) 2(1.1,-0.85) 3(1.1,0.85) 4(-1.1,0.85)
  silkscreen extent -2.26,-1.91 2.03,1.68
D0402_0.55X0.6 [mm]
  rect 0.55x0.55 smd: 1(-0.425,0) 2(0.425,0)
  silkscreen extent -1.04,-0.52 1.03,0.52
DO-214AC [mm]
  rect 2x2 smd: 1(-2.54,0) 2(2.54,0)
  silkscreen extent -2.25,-1.41 2.25,1.4
F1210 [mm]
  rect 1.485x2.781 smd: 1(-1.6,0) 2(1.6,0)
  silkscreen extent -2.67,-1.65 2.67,1.65
IC-88P-QFN9X9-P035 [mm]
  oval 1.5x0.21 smd: 1(-4.8,3.675) 2(-4.8,3.325) 3(-4.8,2.975) 4(-4.8,2.625) 5(-4.8,2.275) 6(-4.8,1.925) 7(-4.8,1.575) 8(-4.8,1.225) 9(-4.8,0.875) 10(-4.8,0.525) 11(-4.8,0.175) 12(-4.8,-0.175) 13(-4.8,-0.525) 14(-4.8,-0.875) 15(-4.8,-1.225) 16(-4.8,-1.575) 17(-4.8,-1.925) 18(-4.8,-2.275) 19(-4.8,-2.625) 20(-4.8,-2.975) 21(-4.8,-3.325) 22(-4.8,-3.675) 45(4.8,-3.675) 46(4.8,-3.325) 47(4.8,-2.975) 48(4.8,-2.625) 49(4.8,-2.275) 50(4.8,-1.925) 51(4.8,-1.575) 52(4.8,-1.225) 53(4.8,-0.875) 54(4.8,-0.525) 55(4.8,-0.175) 56(4.8,0.175) 57(4.8,0.525) 58(4.8,0.875) 59(4.8,1.225) 60(4.8,1.575) 61(4.8,1.925) 62(4.8,2.275) 63(4.8,2.625) 64(4.8,2.975) 65(4.8,3.325) 66(4.8,3.675)
  oval 0.21x1.5 smd: 23(-3.675,-4.8) 24(-3.325,-4.8) 25(-2.975,-4.8) 26(-2.625,-4.8) 27(-2.275,-4.8) 28(-1.925,-4.8) 29(-1.575,-4.8) 30(-1.225,-4.8) 31(-0.875,-4.8) 32(-0.525,-4.8) 33(-0.175,-4.8) 34(0.175,-4.8) 35(0.525,-4.8) 36(0.875,-4.8) 37(1.225,-4.8) 38(1.575,-4.8) 39(1.925,-4.8) 40(2.275,-4.8) 41(2.625,-4.8) 42(2.975,-4.8) 43(3.325,-4.8) 44(3.675,-4.8) 67(3.675,4.8) 68(3.325,4.8) 69(2.975,4.8) 70(2.625,4.8) 71(2.275,4.8) 72(1.925,4.8) 73(1.575,4.8) 74(1.225,4.8) 75(0.875,4.8) 76(0.525,4.8) 77(0.175,4.8) 78(-0.175,4.8) 79(-0.525,4.8) 80(-0.875,4.8) 81(-1.225,4.8) 82(-1.575,4.8) 83(-1.925,4.8) 84(-2.275,4.8) 85(-2.625,4.8) 86(-2.975,4.8) 87(-3.325,4.8) 88(-3.675,4.8)
  round 4 hole 3: 89(0,0)
  Top Layer region: -3.55,3.85 -3.55,-3.85 3.55,-3.85 3.55,3.85 -3.55,3.85
  Top Layer keep-out region: -4.5,4.5 4.5,4.5 4.5,-4.5 -4.5,-4.5 -4.5,4.5
  silkscreen extent -7.21,-7.01 6.91,6.84
IND-SMD_L3.0-W3.0 [mm]
  rect 1.5x3.32 smd: 1(0.247,0.381) 2(-2.409,0.381)
  silkscreen extent -2.61,-1.52 0.44,2.29
L0603 [mm] "Chip Inductor; Body 1.6 x 0.8 mm (LxW typ)"
  rect 0.9x0.8 smd: 1(-0.7,0) 2(0.7,0)
  silkscreen extent -1.45,-0.3 -1.45,0.3
L0805 [mil]
  rect 44.59x54.21 smd: 1(-38.04,0) 2(38.04,0)
  silkscreen extent -77,-40 73,40
L1206 [mm]
  rect 1.485x1.728 smd: 1(-1.593,0) 2(1.593,0)
  silkscreen extent -2.56,-1.09 2.56,1.09
L-MLPS-4018 [mm]
  rect 4.4x1.3 smd: 1(0,-1.55) 2(0,1.55)
  Top Layer keep-out region: -2.14,0.88 2.18,0.88 2.18,-0.86 -2.14,-0.86 -2.14,0.88
  silkscreen extent -2.1,-0.75 2.1,0.75
LED-ARRAY-SMD_4P-L3.2-W2.8-LS3.5-BL_XL-A3528RGBC-BM [mm]
  rect 1.3x0.82 smd paste+0 mask+0.05: 1(-1.55,-0.7) 2(-1.55,0.7) 3(1.55,-0.7) 4(1.55,0.7)
  silkscreen extent -1.6,-1.4 1.6,1.4
LED-SMD_4P-L3.2-W1.6-TL_XL-3216SURUGC [mm]
  rect 0.9x0.7 smd paste+0.051: 1(-1.2,0.5) 2(1.2,0.5) 3(-1.2,-0.5) 4(1.2,-0.5)
  silkscreen extent -2.33,-0.89 2.3,0.89
MAK [mm]
  round 1 smd: 1(0,0)
  Top Layer keep-out region: 1.524,0 1.524,0.15 1.465,0.445 1.351,0.722 1.184,0.971 0.971,1.184 0.722,1.351 0.445,1.465 0.15,1.524 0,1.524 -0.15,1.524 -0.445,1.465 -0.722,1.351 -0.971,1.184 -1.184,0.971 -1.351,0.722 -1.465,0.445 -1.524,0.15 -1.524,0 -1.524,-0.15 -1.465,-0.445 -1.351,-0.722 -1.184,-0.971 -0.971,-1.184 -0.722,-1.351 -0.445,-1.465 -0.15,-1.524 0,-1.524 0.15,-1.524 0.445,-1.465 0.722,-1.351 0.971,-1.184 1.184,-0.971 1.351,-0.722 1.465,-0.445 1.524,-0.15 1.524,0
  silkscreen extent -1.52,-1.52 1.52,1.52
QFN-24-EP(4*4) [mil]
  rect 24.9x11 smd paste-3937 mask+2: 1(-75.8,47.9) 2(-75.8,28.3) 3(-75.8,8.6) 4(-75.8,-11.1) 5(-75.8,-30.8) 6(-75.8,-50.5) 13(74.7,-50.5) 14(74.7,-30.8) 15(74.7,-11.1) 16(74.7,8.6) 17(74.7,28.3) 18(74.7,47.9)
  rect 11x24.9 smd paste-3937 mask+2: 7(-49.7,-76.5) 8(-30.1,-76.5) 9(-10.4,-76.5) 10(9.3,-76.5) 11(29,-76.5) 12(48.7,-76.5) 19(48.7,74) 20(29,74) 21(9.3,74) 22(-10.4,74) 23(-30.1,74) 24(-49.7,74)
  rect 106.3x106.3 smd paste-3937 mask+2: 25(-0.5,-1.3)
  silkscreen extent -96,-83 81,80
R0402 [mm]
  rect 0.55x0.55 smd mask+0.025: 1(-0.508,0) 2(0.508,0)
  Top Layer keep-out region: -0.2,0.325 0.2,0.325 0.2,-0.3 -0.2,-0.3 -0.2,0.325
  silkscreen extent -0.89,-0.38 0.89,0.38
R0603 [mil]
  rect 40x35 smd: 1(-33.46,0) 2(33.46,0)
  Top Layer keep-out region: -11.81,19.69 11.81,19.69 11.81,-19.69 -11.81,-19.69 -11.81,19.69
  silkscreen extent -65,-26 65,26
R1210 [mil]
  rect 47x118 smd: 1(-55,0) 2(55,0)
  silkscreen extent -87,-67 87,67
"SIP4 2.0" [mm]
  round 1.2 hole 0.8: 1(1.194,-0.533) 2(3.194,-0.533) 3(5.194,-0.533) 4(7.194,-0.533)
  silkscreen extent 0,-1.78 8.38,0.66
SIP4-2.54 [mm]
  rect 1.6x1.6 hole 0.9: 1(0,0)
  round 1.6 hole 0.9: 2(2.54,0) 3(5.08,0) 4(7.62,0)
  silkscreen extent -1.27,-1.27 8.89,1.27
SMA [mm]
  rect 1.65x1.53 smd: 1(1.449,-0.076) 2(-2.665,-0.102)
  silkscreen extent -4.16,-1.47 2.8,1.32, body extent -3.06,-1.39 1.84,1.18, height 2.39
"SMD 6.3*5.4 电解" [mm]
  rect 3.5x1.2 smd: 1(-2.822,0.023) 2(2.518,0.023)
  silkscreen extent -3.53,-3.35 3.22,3.4
SMD-KEY-3 [mil]
  rect 35.4x82.7 smd paste-3937 mask+2: 1(-44.1,55.5) 2(74,55.5)
  round 63 hole 43.3 paste+0 mask+2: 3(14.9,-44.9)
  silkscreen extent -74,-232 104,55
SOD-123 [mm]
  rect 0.88x0.99 smd: 1(1.209,-0.15) 2(-2.176,-0.15)
  silkscreen extent -2.12,-1.09 0.92,0.79
SOD-523_L1.2-W0.8-LS1.6-BI [mm]
  rect 0.6x0.4 smd: 1(-0.75,0) 2(0.75,0)
  silkscreen extent -0.65,-0.5 0.65,0.5
SOIC-8_L4.9-W3.9-P1.27-LS6.0-BL [mm]
  oval 0.588x2.045 smd: 1(-1.905,-2.772) 2(-0.635,-2.772) 3(0.635,-2.772) 4(1.905,-2.772) 5(1.905,2.772) 6(0.635,2.772) 7(-0.635,2.772) 8(-1.905,2.772)
  silkscreen extent -2.8,-2.92 2.53,1.52
SOP8-9 [mil]
  oval 24x66.93 smd: 1(-75,-110) 2(-25,-110) 3(25,-110) 4(75,-110) 5(75,110) 6(25,110) 7(-25,110) 8(-75,110)
  rect 90.55x90.55 smd: 9(0,0)
  silkscreen extent -100,-50 100,50, body extent -100,-119 98,119, height 63
SOP8-150+208 [mm]
  rect 2.2x0.6 smd: 1(-3.65,1.905) 2(-3.65,0.635) 3(-3.65,-0.635) 4(-3.65,-1.905) 5(3.65,-1.905) 6(3.65,-0.635) 7(3.65,0.635) 8(3.65,1.905)
  rect 3x4 smd: 9(0,0)
  silkscreen extent -5.32,-2.64 3.95,2.64
SOT23-5P [mil]
  rect 20x50 smd: 1(37.5,50) 2(0,50) 3(-37.5,50) 4(-37.5,-50) 5(37.5,-50)
  silkscreen extent -65,-60 68,75
SOT-23 [mil]
  rect 35x45 smd: 1(-37.4,-46.26) 2(37.4,-46.26) 3(0,46.26)
  silkscreen extent -63,-77 63,77
SOT-23(SOT-23-3) [mm]
  rect 1.25x0.7 smd: 1(1.25,-0.95) 2(1.25,0.95) 3(-1.25,0)
  silkscreen extent -0.65,-1.46 0.9,1.46, body extent -1.5,-1.5 1.5,1.5, height 1.3
SOT-23-5 [mm]
  rect 1.2x0.6 smd paste+0 mask+0.05: 1(-1.325,0.51) 2(-1.325,-0.44) 3(-1.325,-1.39) 4(0.975,-1.39) 5(0.975,0.51)
  silkscreen extent -1.85,-1.94 0.67,1.32
SOT-23-6 [mil]
  rect 20.95x42.2 smd mask+2: 1(-24.81,-10.16) 2(12.59,-10.16) 3(49.99,-10.16) 4(49.99,80.32) 5(12.59,80.32) 6(-24.81,80.32)
  silkscreen extent -59,-22 73,70
SWPA3015S [mm]
  rect 1x2.7 smd: 1(-1.2,0) 2(1.2,0)
  Top Layer keep-out region: -1.7,1.3 1.7,1.3 1.7,-1.3 -1.7,-1.3 -1.7,1.3
  silkscreen extent -1.8,-1.55 1.8,1.55
TP [mil]
  round 40 hole 20: 1(0,0)
  silkscreen extent -30,-30 30,30
USB-C-SMD_HC-TYPE-C-16P-01A [mm]
  oval 1x2.1 hole 0.6 slot 1.7 at 90 deg: 1(-4.32,1.77) 2(4.32,1.77)
  oval 1x1.6 hole 0.6 slot 1.2 at 90 deg: 3(4.32,-2.41) 4(-4.32,-2.41)
  rect 0.6x1.3 smd: A1B12(-3.2,2.41) A4B9(-2.4,2.41) B1A12(3.2,2.41) B4A9(2.4,2.41)
  rect 0.3x1.3 smd: A5(-1.25,2.41) A6(-0.25,2.41) A7(0.25,2.41) A8(1.25,2.41) B5(1.75,2.41) B6(0.75,2.41) B7(-0.75,2.41) B8(-1.75,2.41)
  Keep-Out Layer board cut-out: 2.89,0.938 2.763,0.964 2.656,1.035 2.584,1.143 2.559,1.27 2.584,1.397 2.656,1.504 2.763,1.576 2.89,1.601 2.89,1.601 3.017,1.576 3.124,1.504 3.196,1.397 3.221,1.27 3.196,1.143 3.124,1.035 3.017,0.964 2.89,0.938
  Keep-Out Layer board cut-out: -2.89,0.939 -3.017,0.964 -3.124,1.036 -3.196,1.143 -3.221,1.27 -3.196,1.397 -3.124,1.504 -3.017,1.576 -2.89,1.601 -2.89,1.601 -2.763,1.576 -2.656,1.504 -2.584,1.397 -2.559,1.27 -2.584,1.143 -2.656,1.036 -2.763,0.964 -2.89,0.939
  Keep-Out Layer circle w0.005: c2.89,1.27 r0.325
  Keep-Out Layer circle w0.005: c-2.89,1.27 r0.325
  Keep-Out Layer region: 2.89,0.938 2.763,0.964 2.656,1.035 2.584,1.143 2.559,1.27 2.584,1.397 2.656,1.504 2.763,1.576 2.89,1.601 2.89,1.601 3.017,1.576 3.124,1.504 3.196,1.397 3.221,1.27 3.196,1.143 3.124,1.035 3.017,0.964 2.89,0.938
  Keep-Out Layer region: -2.89,0.939 -3.017,0.964 -3.124,1.036 -3.196,1.143 -3.221,1.27 -3.196,1.397 -3.124,1.504 -3.017,1.576 -2.89,1.601 -2.89,1.601 -2.763,1.576 -2.656,1.504 -2.584,1.397 -2.559,1.27 -2.584,1.143 -2.656,1.036 -2.763,0.964 -2.89,0.939
  silkscreen extent -4.5,-5.01 4.5,0.51